# Altium PCB PCBVer3.PcbDoc
Units mm, origin at the board's own origin, x right, y up, seen from the top; angles counter-clockwise.
Board outline 39.9 x 13 mm, 6 copper layers (Top Signal Layer, GND_1, PWR, Mid Signal Layer, GND_2, Bottom Signal Layer), stack 1.244 mm thick; 66 components, 58 nets, 318 pads, 85 vias.
Unrouted connection lines stored in the file: 2.
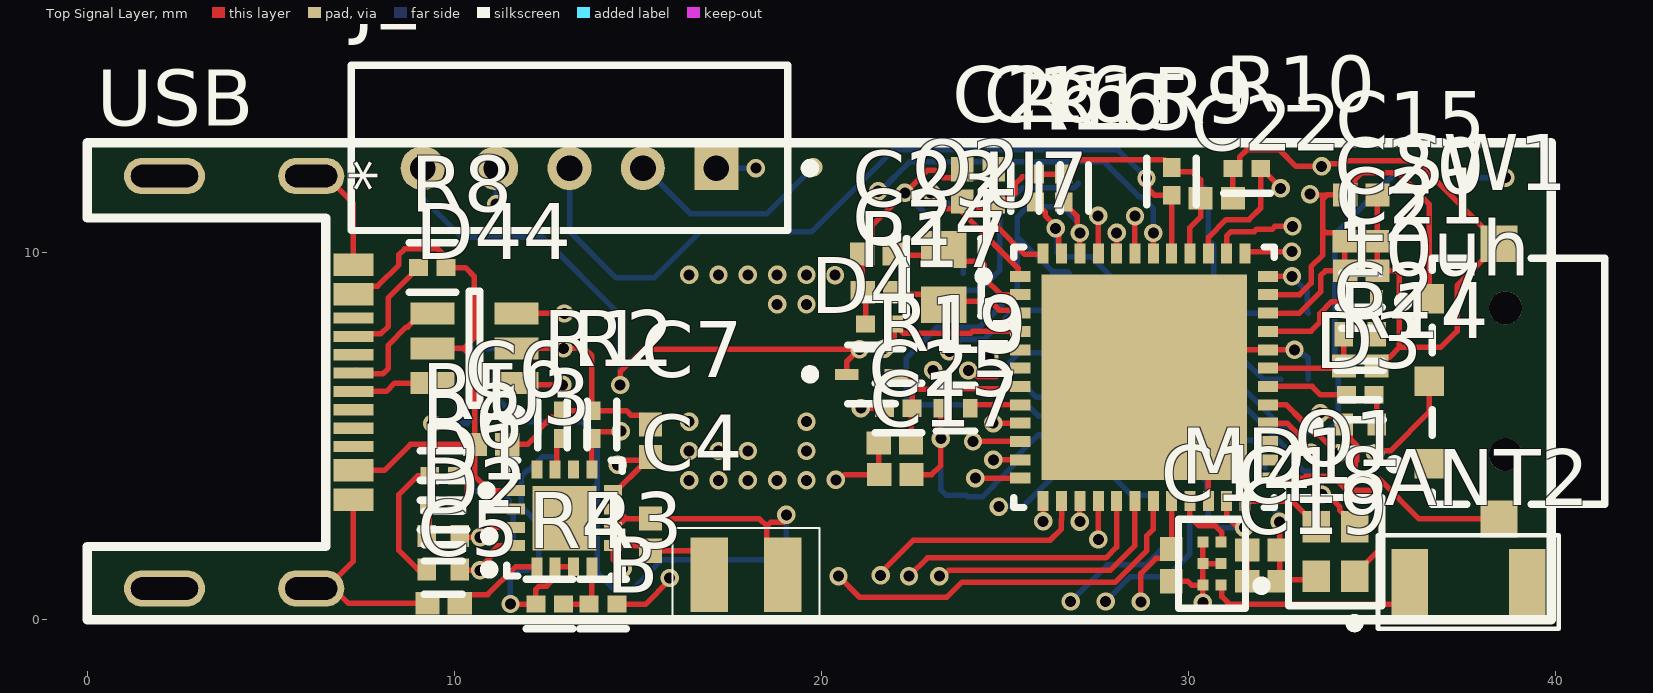
[diagram p0: Top Signal Layer view]
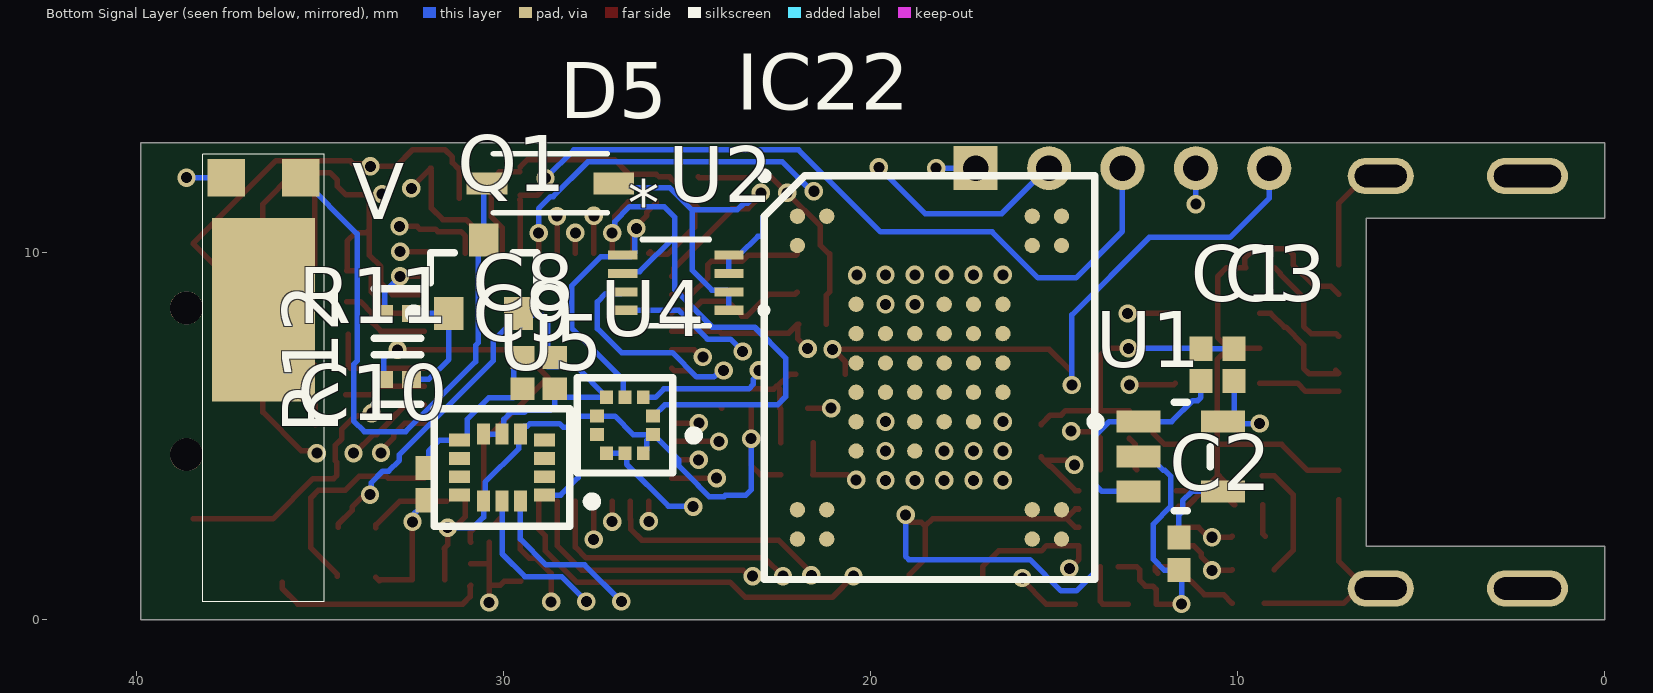
[diagram p1: Bottom Signal Layer view, seen from below]
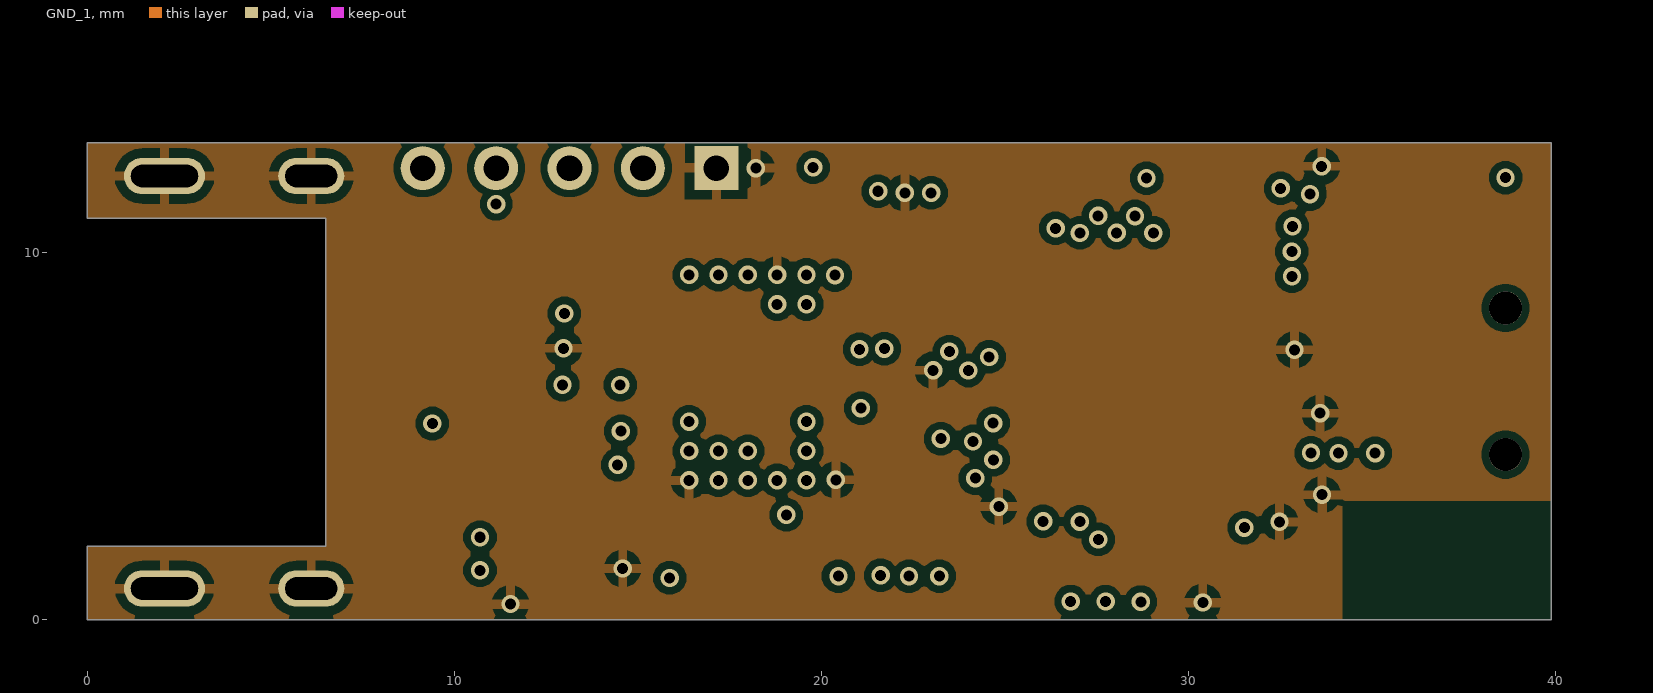
[diagram p2: GND_1]
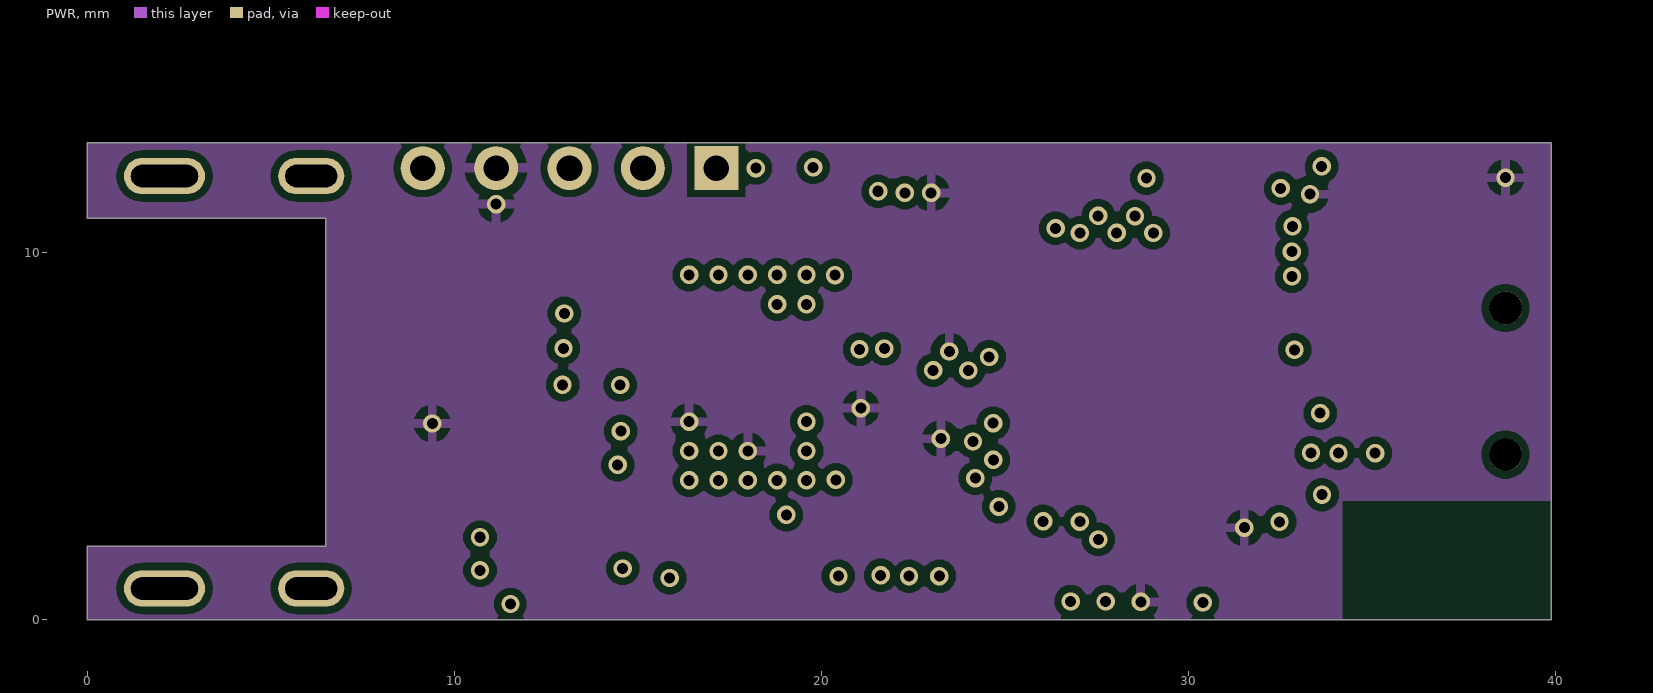
[diagram p3: PWR]
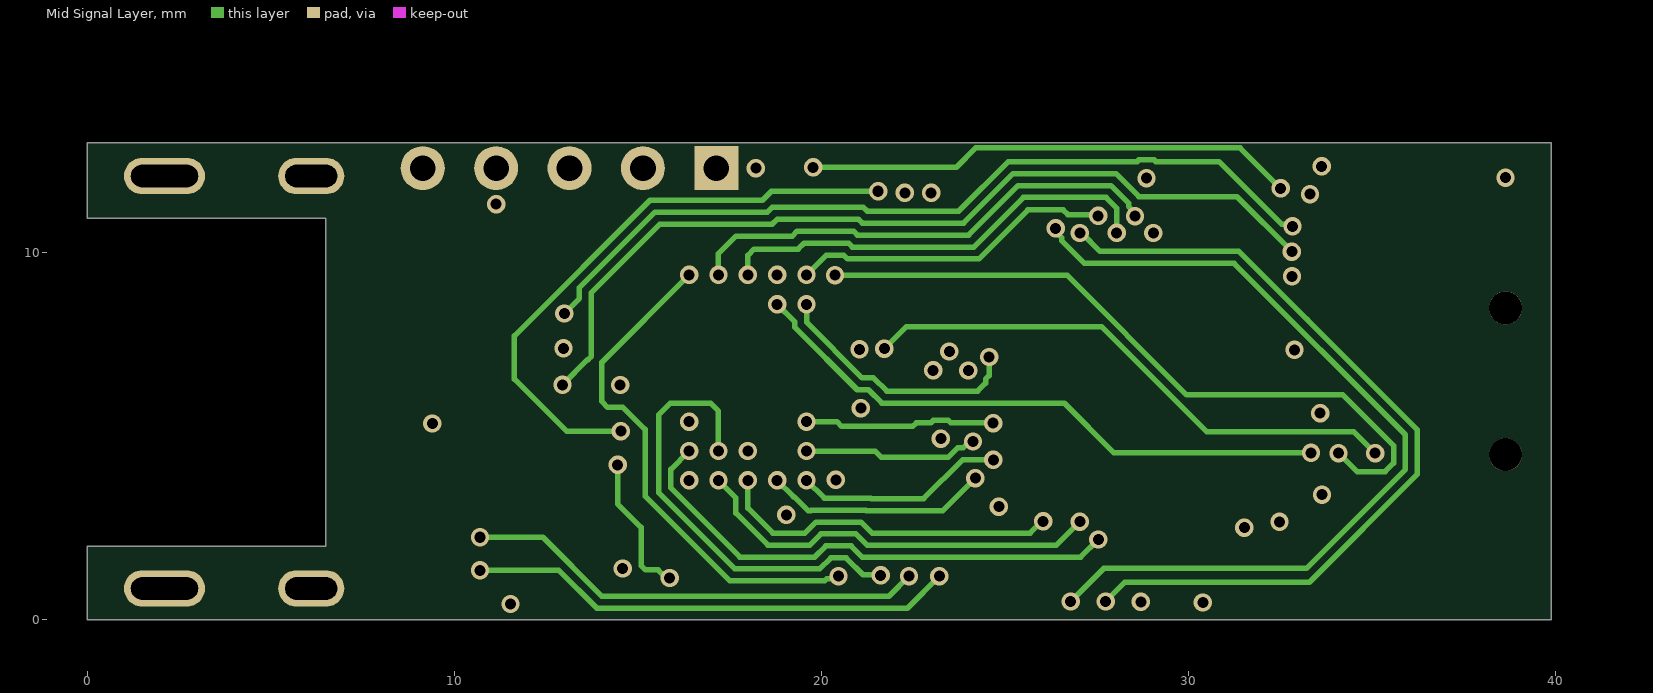
[diagram p4: Mid Signal Layer]
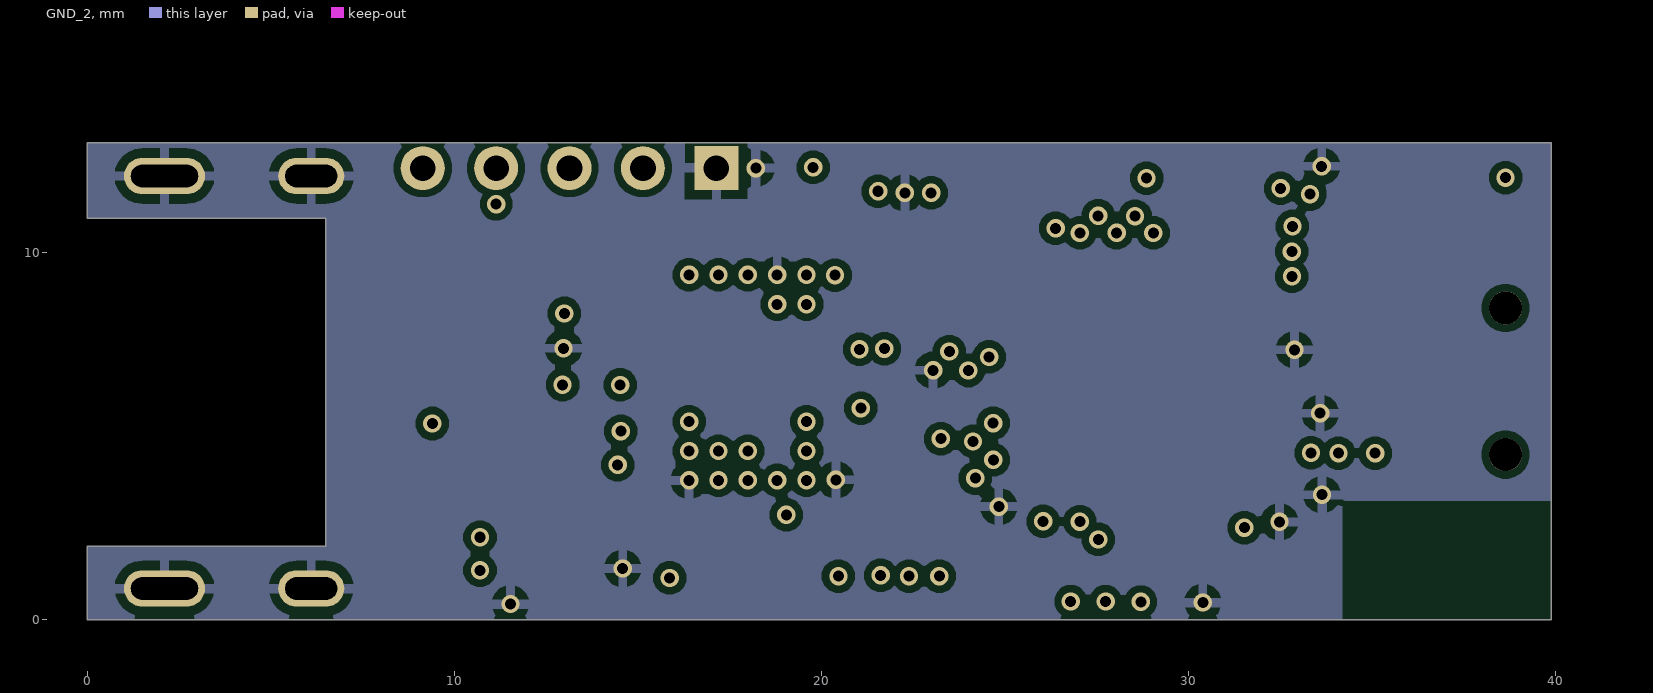
[diagram p5: GND_2]
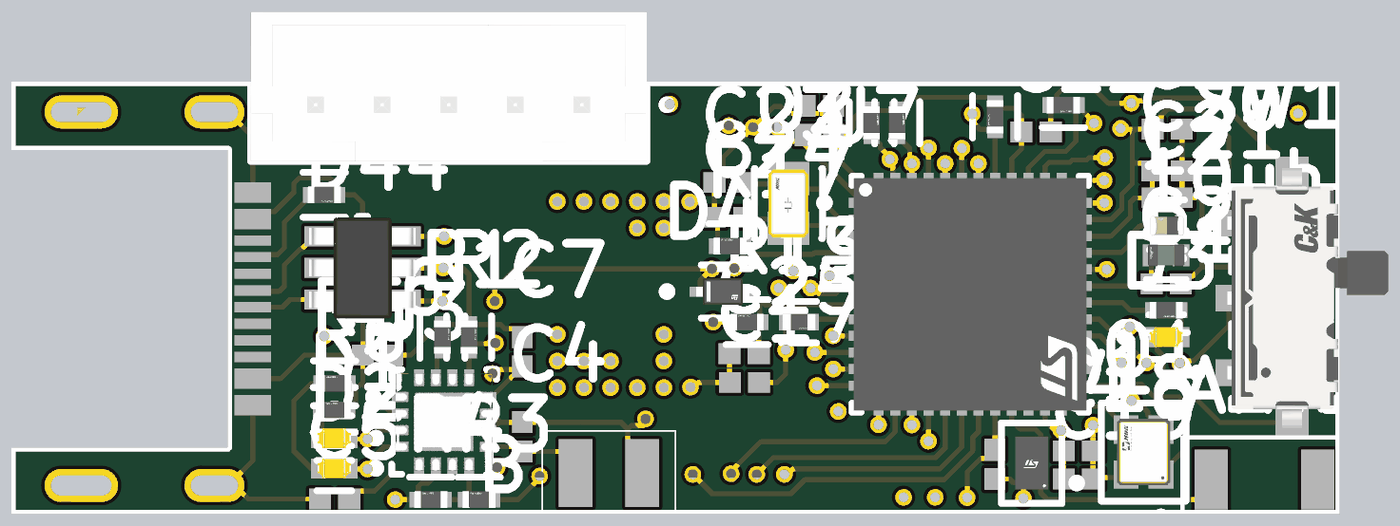
[diagram p6: 3D render of the assembled board from above, using the file's embedded part models]

## Layer stack, top to bottom
Top Solder: solder mask 0.0102, Solder Resist, Dk 3.5
Top Signal Layer: signal copper 0.018
Dielectric 2: prepreg 0.125, PP-006, Dk 4.1
GND_1: signal copper 0.035
Dielectric 4: prepreg 0.0711, PP-006, Dk 4.1
PWR: signal copper 0.018
Dielectric 1: dielectric 0.71, FR-4, Dk 4.8
Mid Signal Layer: signal copper 0.018
Dielectric 5: prepreg 0.0711, PP-006, Dk 4.1
GND_2: signal copper 0.035
Dielectric 3: prepreg 0.125, PP-006, Dk 4.1
Bottom Signal Layer: signal copper 0.018
Bottom Solder: solder mask 0.0102, Solder Resist, Dk 3.5

## Board outline
0,10.95 0,13 39.9,13 39.9,0 0,0 0,2 6.5,2 6.5,10.95

## Design rules (kind name [scope] priority, off if disabled: settings)
Clearance [All] p1: gap=0.2 ignorepadtopadclearanceinfootprint=FALSE except(0.175: Arc-Arc Arc-Track Arc-Via Arc-Hole Track-Track Track-Via Track-Hole Via-Via Via-Hole)
PolygonConnect [All] p1: connectstyle=Relief reliefconductorwidth=0.254 reliefentries=4 polygonreliefangle="90 Angle" airgapwidth=0.254
RoomDefinition U_LSM6DSRXTR [InComponentClass('U_LSM6DSRXTR')] p1: confinementstyle=ConfineIn formatcopy=TRUE lockcomponents=FALSE outline 26.8,-0.35 35.45,-0.35 35.45,7.3 26.8,7.3
RoomDefinition U_VIBRO [InComponentClass('U_VIBRO')] p2: confinementstyle=ConfineIn formatcopy=TRUE lockcomponents=FALSE outline 20.3,0.1 42.6,0.1 42.6,13.45 20.3,13.45
RoomDefinition U_LPS22HBTR [InComponentClass('U_LPS22HBTR')] p3: confinementstyle=ConfineIn formatcopy=TRUE lockcomponents=FALSE outline 30.3,3.15 24.6,3.15 24.6,7.9 30.3,7.9
RoomDefinition U_SWD [InComponentClass('U_SWD')] p4: confinementstyle=ConfineIn formatcopy=TRUE lockcomponents=FALSE outline 32.7,10.7 32.7,13.45 8,13.45 8,10.7
RoomDefinition U_M24512-DFMC6TG [InComponentClass('U_M24512-DFMC6TG')] p5: confinementstyle=ConfineIn formatcopy=TRUE lockcomponents=FALSE outline 22.7,10.65 22.7,7.5 27.6,7.5 27.6,10.65
RoomDefinition U_LD3985M33R [InComponentClass('U_LD3985M33R')] p6: confinementstyle=ConfineIn formatcopy=TRUE lockcomponents=FALSE outline 16.1,-0.35 16.1,8.65 7.6,8.65 7.6,-0.35
RoomDefinition U_STM32WB55CGU6 [InComponentClass('U_STM32WB55CGU6')] p7: confinementstyle=ConfineIn formatcopy=TRUE lockcomponents=FALSE outline 13.2,-0.36 42.57,-0.36 42.57,13.44 13.2,13.44
RoomDefinition U_L6924D013TR [InComponentClass('U_L6924D013TR')] p8: confinementstyle=ConfineIn formatcopy=TRUE lockcomponents=FALSE outline 8.35,-0.37 20.3,-0.37 20.3,6.33 8.35,6.33
RoomDefinition U_USB [InComponentClass('U_USB')] p9: confinementstyle=ConfineIn formatcopy=TRUE lockcomponents=FALSE outline -0.35,-0.35 13.15,-0.35 13.15,13.45 -0.35,13.45
RoutingVias [All] p1: holewidth=0.3 width=0.5 viastyle="Through Hole" minholewidth=0.3 minwidth=0.5 maxholewidth=0.3 maxwidth=0.5
SolderMaskExpansion [All] p1: expansion=0.102 istentingtop=FALSE
Width [All] p1: maxlimit=0.4 minlimit=0.15 preferedwidth=0.15 midlayer3_minwidth=0.254 midlayer3_maxwidth=0.254 midlayer3_prefwidth=0.254 midlayer4_minwidth=0.254 midlayer4_maxwidth=0.254 midlayer4_prefwidth=0.254 minimp=50.000000 maximp=50.000000 favimp=50.000000
30 further rules are at their usual default settings.

## Classes and differential pairs
component class U_VIBRO: D5 Q1 R11 R12 V
component class U_USB: D44 R8 USB
component class U_TC58BVG1S3HBAI4: IC22
component class U_SWD: J2 R9 R10
component class U_STM32WB55CGU6: 10uh ANT2 C14 C15 C16 C17 C18 C19 C20 C21 C22 C23 C24 C25 C26 C27 D3 D4 L2 L3 MD1 O1 O2 R14 R15 R16 R17 R19 SW1 U7
component class U_M24512-DFMC6TG: U2
component class U_LSM6DSRXTR: C9 C10 U5
component class U_LPS22HBTR: C8 U4
component class U_LD3985M33R: C1 C2 C3 U1
component class U_L6924D013TR: B C4 C5 C6 C7 D1 D2 R1 R2 R3 R4 R5 R6 U3

## Components (designator, comment, footprint, x,y, rotation, side; value= is the part's Value field where it differs from the comment)
10uh "L1" FP-LQW15DN_00-MFG 34.69,7.78 r180 top
ANT2 "KH3216-A55" KH3216-A55 37.69,1.03 r270 top
B "BAT-CON" BAT-CON 17.95,1.23 r180 top
C1 "10 uF" CAPC1005X55X25NL05T10 11,6.95 r270 bottom
C2 "10 nF" CAPC1005X55X25NL05T10 11.6,1.8 r90 bottom
C3 "1 uF" CAPC1005X55X25NL05T10 10.1,6.95 r270 bottom
C4 "1 uF" CAPC1005X55X25NL05T10 15.35,2.32 r90 top
C5 "330 pF" CAPC1005X55X25NL05T10 9.71,0.449 r180 top
C6 "1 uF" CAPC1005X55X25NL05T10 11,4.78 r0 top
C7 "1 uF" CAPC1005X55X25NL05T10 15.35,4.88 r270 top
C8 "4.7 uF" CAPC1005X55X25NL05T10 29.05,7.15 r0 bottom
C9 "100 nF" CAPC1005X55X25NL05T10 29.05,6.3 r0 bottom
C10 "100 nF" CAPC1005X55X25NL05T10 32.1,3.7 r90 bottom
C14 "100 nF" CAPC1005X55X25NL05T10 29.54,1.49 r270 top
C15 "100 nF" CAPC1005X55X25NL05T10 34.72,11.58 r180 top
C16 "100 nF" CAPC1005X55X25NL05T10 24.7,11.84 r90 top
C17 "100 nF" CAPC1005X55X25NL05T10 22.02,3.96 r0 top
C18 "100 nF" CAPC1005X55X25NL05T10 32.05,1.9 r0 top
C19 "100 pF" CAPC1005X55X25NL05T10 32.05,1.05 r180 top
C20 "4.7 uF" CAPC1005X55X25NL05T10 34.71,10.32 r180 top
C21 "100 nF" CAPC1005X55X25NL05T10 34.72,9.51 r0 top
C22 "100 nF" CAPC1005X55X25NL05T10 30.78,11.49 r180 top
C23 "4.3 pF" CAPC1005X55X25NL05T10 21.56,9.97 r180 top
C24 "4.3 pF" CAPC1005X55X25NL05T10 21.57,8.93 r0 top
C25 "100 nF" CAPC1005X55X25NL05T10 22.01,4.82 r0 top
C26 "100 nF" CAPC1005X55X25NL05T10 23.84,11.84 r270 top
C27 "4.7 uF" CAPC1005X55X25NL05T10 34.69,6.92 r0 top
D1 "LED" FP-SML-P11MTT86-MFG 9.7,2.28 r180 top
D2 "LED" FP-SML-P11MTT86-MFG 9.7,1.37 r180 top
D3 "LED" FP-SML-P11MTT86-MFG 34.69,5.32 r0 top
D4 "BAT54KFILM" FP-SOD-523-MFG 21.37,6.69 r0 top value=7pF
D5 "BAT43W-7-F" BAT43W-7-F 28.68,11.92 r0 bottom
D44 "USBLC6-2SC6" STM-SOT23-6L_V 10.55,7.4 r180 top
IC22 "TC58BVG1S3HBAI4" BGA63C80P10X12_900X1100X100 18.4,6.6 r180 bottom
J2 "B5B-PH-K-S(LF)(SN)" FP-B5B-PH-K-S_LF_SN-MFG 13.14,12.86 r180 top
L2 "10nh" FP-LQG15WH_02-MFG 34.71,8.67 r180 top
L3 "FBH1005-601Y" FP-BLM15-0_05-MFG 23.66,5.77 r0 top
MD1 "MLPF-WB55-01E3" FP-MLPF-WB55-01E3-MFG 30.65,1.53 r180 top
O1 "NX2016SA-32MHZ" FP-NX2016SA-MFG 34.01,1.86 r90 top
O2 "NX2012SA-32.768K" FP-NX2012SA-MFG 23.34,9.34 r270 top
Q1 "DMG3420U-7" DIOD-SOT23-3_B_V 30.55,9.35 r90 bottom
R1 "130 Kohm" FP-RC1005-IPC_C 12.95,5.32 r90 top
R2 "3.3 Kohm" FP-RC1005-IPC_C 13.75,5.32 r90 top
R3 "1 Kohm" FP-RC1005-IPC_C 14.05,0.43 r180 top
R4 "470 ohm" FP-RC1005-IPC_C 12.6,0.43 r180 top
R5 "680 Om" FP-RC1005-IPC_C 9.71,3.93 r180 top
R6 "680 Om" FP-RC1005-IPC_C 9.7,3.13 r180 top
R8 "5.3 Kohm" FP-RC1005-IPC_C 9.4,9.6 r0 top
R9 "10 Kohm" FP-RC1005-IPC_C 29.55,11.95 r270 top
R10 "10 Kohm" FP-RC1005-IPC_C 31.6,12.3 r0 top
R11 "100 Kohm" FP-RC1005-IPC_C 32.9,6.55 r0 bottom
R12 "100 ohm" FP-RC1005-IPC_C 32.9,8.35 r0 bottom
R14 "0 ohm" FP-RC1005-IPC_C 34.69,6.13 r0 top
R15 "1.8 Kohm" FP-RC1005-IPC_C 26.61,11.77 r90 top
R16 "1.8 Kohm" FP-RC1005-IPC_C 25.84,11.77 r90 top
R17 "10Kohm" FP-RC1005-IPC_C 21.59,8.06 r180 top
R19 "100 Kohm" FP-RC1005-IPC_C 22.1,5.77 r180 top
SW1 "JS102000SAQN" FP-JS102000SAQN-MFG 39,6.5 r90 top
U1 "LD3985M33R" FP-SOT23-5L-7049676-MFG 11.55,4.45 r180 bottom
U2 "M24512-DFMC6TG" M24512-DFMC6TG 25.34,9.29 r0 bottom
U3 "L6924D013TR" FP-VFQFPN16-7185330-MFG 13,2.77 r0 top
U4 "LPS22HBTR" FP-HLGA-10L-8479831-0 26.7,5.3 r0 bottom
U5 "LSM6DSRXTR" FP-LGA-14L-DM00249496-MFG 30.05,4.15 r0 bottom
U7 "STM32WB55CGU6" FP-STM32WB55CGU6-MFG 28.8,6.61 r0 top
USB "USB4510-03-1-A" USB4510-03-1-A 3.3,6.5 r270 top
V "VIBRO" VIBRO 36.55,12.05 r180 bottom

## Footprints (in the part's own frame and the unit in brackets; to place one, negate y for a bottom-side part, rotate by r counter-clockwise, add the part's x,y. Pads: shape width x height; smd on the part's side, far side on the other; paste and mask are expansions set on the pad)
BAT43W-7-F [mil]
  rect 43.75x23.65 smd paste+0 mask+0: 1(-65.91,1) 2(69.91,1)
  silkscreen extent -59,-31 63,33
BAT-CON [mil]
  rect 40x80 smd: 1(-39.37,0) 2(39.37,0)
  silkscreen extent -79,-50 79,50
BGA63C80P10X12_900X1100X100 [mm]
  round 0.418 smd: A1(-3.6,4.4) A2(-2.8,4.4) A9(2.8,4.4) A10(3.6,4.4) B1(-3.6,3.6) B9(2.8,3.6) B10(3.6,3.6) C3(-2,2.8) C4(-1.2,2.8) C5(-0.4,2.8) C6(0.4,2.8) C7(1.2,2.8) C8(2,2.8) D3(-2,2) D4(-1.2,2) D5(-0.4,2) D6(0.4,2) D7(1.2,2) D8(2,2) E3(-2,1.2) E4(-1.2,1.2) E5(-0.4,1.2) E6(0.4,1.2) E7(1.2,1.2) E8(2,1.2) F3(-2,0.4) F4(-1.2,0.4) F5(-0.4,0.4) F6(0.4,0.4) F7(1.2,0.4) F8(2,0.4) G3(-2,-0.4) G4(-1.2,-0.4) G5(-0.4,-0.4) G6(0.4,-0.4) G7(1.2,-0.4) G8(2,-0.4) H3(-2,-1.2) H4(-1.2,-1.2) H5(-0.4,-1.2) H6(0.4,-1.2) H7(1.2,-1.2) H8(2,-1.2) J3(-2,-2) J4(-1.2,-2) J5(-0.4,-2) J6(0.4,-2) J7(1.2,-2) J8(2,-2) K3(-2,-2.8) K4(-1.2,-2.8) K5(-0.4,-2.8) K6(0.4,-2.8) K7(1.2,-2.8) K8(2,-2.8) L1(-3.6,-3.6) L2(-2.8,-3.6) L9(2.8,-3.6) L10(3.6,-3.6) M1(-3.6,-4.4) M2(-2.8,-4.4) M9(2.8,-4.4) M10(3.6,-4.4)
  silkscreen extent -4.6,-5.5 4.5,5.6, body extent -4.5,-5.5 4.5,5.5, height 1
CAPC1005X55X25NL05T10 [mm] "Chip Capacitor, 2-Leads, Body 1.00x0.50mm, IPC Medium Density"
  rect 0.66x0.62 smd: 1(-0.44,0) 2(0.44,0)
  body extent -0.53,-0.28 0.53,0.27, height 0.55
DIOD-SOT23-3_B_V [mm] "SOT23, 3-Leads, Body 2.9x1.3mm, Pitch 0.95mm"
  rect 0.9x0.8 smd: 1(-1,0.95) 2(-1,-0.95) 3(1,0)
  silkscreen extent -1.12,-1.45 0.65,2.03, body extent -0.65,-1.45 0.65,1.45, height 1.17
FP-B5B-PH-K-S_LF_SN-MFG [mm]
  rect 1.2x1.2 hole 0.7 paste-2539.97 mask+0: 1(-4,0.55)
  round 1.2 hole 0.7 paste-2539.97 mask+0: 2(-2,0.55) 3(0,0.55) 4(2,0.55) 5(4,0.55)
  silkscreen extent -6.68,-2.25 5.95,2.25, body extent -6.05,-2.35 6.05,2.35, height 0.25
FP-BLM15-0_05-MFG [mm]
  rect 0.4x0.5 smd paste+0 mask+0: 1(-0.4,0) 2(0.4,0)
  silkscreen extent -0.53,-0.63 0.52,0.63, body extent -0.7,-0.38 0.7,0.38, height 0.25
FP-HLGA-10L-8479831-0 [mm]
  rect 0.375x0.35 smd paste+0 mask+0: 1(-0.763,0.25) 2(-0.763,-0.25) 6(0.763,-0.25) 7(0.763,0.25)
  rect 0.35x0.375 smd paste+0 mask+0: 3(-0.5,-0.763) 4(0,-0.763) 5(0.5,-0.763) 8(0.5,0.763) 9(0,0.763) 10(-0.5,0.763)
  silkscreen extent -2,-1.3 1.3,1.3, body extent -1,-1 1,1, height 0.8
FP-JS102000SAQN-MFG [mm]
  rect 0.8x0.8 smd paste+0 mask+0: 1(-2.25,2.43) 2(0,2.43) 3(2.25,2.43)
  rect 1x1 smd paste+0 mask+0: 4(-3.75,0.53) 5(3.75,0.53)
  round 0.9 hole 0.9 unplated paste-2539.97 mask+0: ""(-2,0.35) ""(2,0.35)
  silkscreen extent -3.35,-2.35 3.35,3.5, body extent -4.35,-2.45 4.35,2.93, height 0.25
FP-LGA-14L-DM00249496-MFG [mm]
  rect 0.575x0.35 smd paste-1000 mask+0: 1(-1.162,0.75) 2(-1.162,0.25) 3(-1.162,-0.25) 4(-1.162,-0.75) 8(1.162,-0.75) 9(1.162,-0.25) 10(1.162,0.25) 11(1.162,0.75)
  rect 0.35x0.575 smd paste-1000 mask+0: 5(-0.5,-0.913) 6(0,-0.913) 7(0.5,-0.913) 12(0.5,0.913) 13(0,0.913) 14(-0.5,0.913)
  silkscreen extent -2.57,-1.6 1.85,1.6, body extent -1.5,-1.25 1.5,1.25, height 0.86
FP-LQG15WH_02-MFG [mm]
  rect 0.35x0.65 smd paste+0 mask+0: 1(-0.425,0) 2(0.425,0)
  silkscreen extent -1.28,-0.78 0.53,0.72, body extent -0.7,-0.43 0.7,0.43, height 0.25
FP-LQW15DN_00-MFG [mm]
  rect 0.5x0.66 smd paste+0 mask+0: 1(-0.45,0) 2(0.45,0)
  silkscreen extent -0.6,-0.74 0.6,0.72, body extent -0.8,-0.48 0.8,0.48, height 0.25
FP-MLPF-WB55-01E3-MFG [mm]
  rect 0.3x0.3 smd paste-1000 mask-1000: A1(-0.25,0.587) A2(-0.25,0) A3(-0.25,-0.587) B1(0.25,0.587) B2(0.25,0) B3(0.25,-0.587)
  silkscreen extent -1.48,-1.21 0.91,1.21, body extent -1.01,-1.31 1.01,1.31, height 0.25
FP-NX2012SA-MFG [mm]
  rect 1x1.25 smd paste+0 mask+0: 1(-0.75,0) 2(0.75,0)
  silkscreen extent -1.05,-1.02 1.05,1.02, body extent -1.35,-0.72 1.35,0.72, height 0.25
FP-NX2016SA-MFG [mm]
  rect 0.85x0.75 smd paste+0 mask+0: 1(-0.675,-0.525) 2(0.675,-0.525) 3(0.675,0.525) 4(-0.675,0.525)
  silkscreen extent -2.07,-1.28 1.48,1.28, body extent -1.2,-1 1.2,1, height 0.25
FP-RC1005-IPC_C [mm]
  rect 0.515x0.472 smd paste+0 mask+0: 1(-0.379,0) 2(0.379,0)
  silkscreen extent -0.64,-0.67 0.64,0.67, body extent -0.74,-0.38 0.74,0.38, height 0.25
FP-SML-P11MTT86-MFG [mm]
  rect 0.5x0.6 smd paste+0 mask+0: 1(-0.45,0) 2(0.45,0)
  silkscreen extent -1.38,-0.67 0.53,0.67, body extent -0.8,-0.43 0.8,0.43, height 0.25
FP-SOD-523-MFG [mm]
  rect 0.65x0.3 smd paste+0 mask+0: 1(-0.675,0) 2(0.675,0)
  silkscreen extent -1.8,-0.8 0.65,0.8, body extent -1.1,-0.55 1.1,0.55, height 0.25
FP-SOT23-5L-7049676-MFG [mm]
  rect 1.2x0.6 smd paste+0 mask+0: 1(-1.15,0.95) 2(-1.15,0) 3(-1.15,-0.95) 4(1.15,-0.95) 5(1.15,0.95)
  silkscreen extent -2.45,-1.48 0.8,1.47, body extent -0.87,-1.5 0.87,1.5, height 1.45
FP-STM32WB55CGU6-MFG [mm]
  rect 0.55x0.3 smd paste+0 mask+0: 1(-3.375,2.75) 2(-3.375,2.25) 3(-3.375,1.75) 4(-3.375,1.25) 5(-3.375,0.75) 6(-3.375,0.25) 7(-3.375,-0.25) 8(-3.375,-0.75) 9(-3.375,-1.25) 10(-3.375,-1.75) 11(-3.375,-2.25) 12(-3.375,-2.75) 25(3.375,-2.75) 26(3.375,-2.25) 27(3.375,-1.75) 28(3.375,-1.25) 29(3.375,-0.75) 30(3.375,-0.25) 31(3.375,0.25) 32(3.375,0.75) 33(3.375,1.25) 34(3.375,1.75) 35(3.375,2.25) 36(3.375,2.75)
  rect 0.3x0.55 smd paste+0 mask+0: 13(-2.75,-3.375) 14(-2.25,-3.375) 15(-1.75,-3.375) 16(-1.25,-3.375) 17(-0.75,-3.375) 18(-0.25,-3.375) 19(0.25,-3.375) 20(0.75,-3.375) 21(1.25,-3.375) 22(1.75,-3.375) 23(2.25,-3.375) 24(2.75,-3.375) 37(2.75,3.375) 38(2.25,3.375) 39(1.75,3.375) 40(1.25,3.375) 41(0.75,3.375) 42(0.25,3.375) 43(-0.25,3.375) 44(-0.75,3.375) 45(-1.25,3.375) 46(-1.75,3.375) 47(-2.25,3.375) 48(-2.75,3.375)
  rect 5.6x5.6 smd paste+0 mask+0: 49(0,0)
  silkscreen extent -4.5,-3.55 3.55,3.55, body extent -3.75,-3.75 3.75,3.75, height 0.25
FP-VFQFPN16-7185330-MFG [mm]
  rect 0.5x0.3 smd paste+0 mask+0: 1(-1.325,0.75) 2(-1.325,0.25) 3(-1.325,-0.25) 4(-1.325,-0.75) 9(1.325,-0.75) 10(1.325,-0.25) 11(1.325,0.25) 12(1.325,0.75)
  rect 0.3x0.5 smd paste+0 mask+0: 5(-0.75,-1.325) 6(-0.25,-1.325) 7(0.25,-1.325) 8(0.75,-1.325) 13(0.75,1.325) 14(0.25,1.325) 15(-0.25,1.325) 16(-0.75,1.325)
  rect 1.75x1.75 smd paste+0 mask+0: 17(0,0)
  silkscreen extent -2.25,-1.58 1.58,1.58, body extent -1.68,-1.68 1.68,1.68, height 0.25
KH3216-A55 [mm]
  rect 1.8x1 smd: 1(0,-1.651) 2(0,1.549)
  silkscreen extent -1.27,-2.51 1.27,2.41
M24512-DFMC6TG [mm]
  rect 0.8x0.25 smd paste+0 mask+0: 1(-1.475,0.852) 2(-1.475,0.352) 3(-1.475,-0.149) 4(-1.475,-0.649) 5(1.424,-0.649) 6(1.424,-0.149) 7(1.424,0.352) 8(1.424,0.852)
  silkscreen extent -2.53,-1.08 0.88,1.28
STM-SOT23-6L_V [mm] "SOT23, 6-Leads, Body 3.05x1.75mm, Pitch 0.95mm"
  rect 1.2x0.6 smd: 1(-1.15,0.95) 2(-1.15,0) 3(-1.15,-0.95) 4(1.15,-0.95) 5(1.15,0) 6(1.15,0.95)
  silkscreen extent -1.28,-1.55 0.15,1.92, body extent -1.6,-1.53 1.6,1.53, height 1.45
USB4510-03-1-A [mil]
  rect 24x43 smd paste+0 mask+0: A1-B12(-125,155.5) A4-B9(-93.5,155.5) B1-A12(127,155.5) B4-A9(95.5,155.5)
  rect 12x43 smd paste+0 mask+0: A5(-48.2,155.5) A6(-8.8,155.5) A7(10.9,155.5) A8(50.3,155.5) B5(70,155.5) B6(30.6,155.5) B7(-28.5,155.5) B8(-68,155.5)
  oval 39x71 hole 24 slot 56 at 90 deg: GND(-220.25,110.25) GND(222.25,110.25)
  oval 39x87 hole 24 slot 72 at 90 deg: GND(-220.25,-47.2) GND(222.25,-47.2)
VIBRO [mil]
  rect 40x40 smd mask+1: 1(40,0) 2(-40,0)
  rect 110.24x196.85 smd: 3(0,-141.73)
  silkscreen extent -65,-455 65,25

## Part data
10uh: library part CMP-06042-016523-1, "FIXED IND 10UH 120MA 5.405OHM", RoHS Compliant=Yes
C1 C2 C3 C4 C5 C6 C7 C8 C9 C10 C14 C15 C16 C17 C18 C19 C20 C21 C22 C23 C24 C25 C26 C27: library part CMP-2008-04515-1, Manufacturer=Murata, Part Number=GRM155F50J684ZE01D
D1 D2 D3: library part CMP-2000-07126-2, "LED YELLOW/GREEN CLEAR 1006 SMD", Case Code (Imperial)=0402, Case Code (Metric)=1005, Color=Green, Forward Current=20mA, Forward Voltage=1.9V, Lens Color=Colorless, Max Operating Temperature=85°C, Min Operating Temperature=-40°C, Package Quantity=1, Power Rating=54mW, Test Current=1mA, Case/Package=0402, Dominant Wavelength=569nm, Height=0.25mm, Illumination Color=Green, Lead Free="Lead Free", Length=1mm, Lens Style=Diffused, Lens Transparency=Clear, Luminous Intensity=2.1mcd, Mount="Surface Mount", Number of LEDs=1, Number of Pins=2, Packaging="Tape and Reel", Radiation Hardening=No, REACH SVHC="No SVHC", RoHS Compliant=Yes, Series=PicoLED™, Viewing Angle=150°, Wavelength=569nm, Width=0.6mm
D4: library part CMP-12187-000026-1, "DIODE SCHOTTKY 40V 300MA SOD523", Capacitance=7pF, Forward Current=300mA, Manufacturer=STMicroelectronics, Max Junction Temp=+150°C, Max Repetitive Reverse Voltage=40V, Max Surge Forward Current=1.25A, Package=SOD-523, Peak Reverse Current=1uA, Temperature="-40°C to +150°C", Temperature Range Low=-40°C, Automotive=No, Category=Diode, ComponentLink2Description=Datasheet, ComponentLink2URL=https://www.st.com/content/ccc/resource/technical/document/datasheet/07/50/54/f2/0d/ba/4a/79/CD00001322.pdf/files/CD00001322.pdf/jcr:content/translations/en.CD00001322.pdf, Device Class L1="Discrete Semiconductors", Device Class L2=Diodes, Device Class L3="Schottky Diodes", Digikey Description="DIODE SCHOTTKY 40V 300MA SOD523", Height=0.7mm, Lead Free=Yes, Manufacturer Part Number=BAT54KFILM, Mouser Description="Schottky Diodes & Rectifiers schottky diode", Octopart=https://octopart.com/bat54kfilm-stmicroelectronics-39618022, RoHS=TRUE, Temperature Range High=+150°C
D44: library part CMP-2000-05378-1, "Very low capacitance ESD protection, 3.5 pF, -40 to 125 degC, 6-Pin SOT23, RoHS, Tape and Reel", Capacitance Value=3.5pF, Clamping Voltage=17V, Leakage Current=0.15uA, Manufacturer=STMicroelectronics, Operating Temp Range=-40Cto125C, Operating Temperature Classification=Automotive, Operating Temperature Max Deg. C=125C, Operating Temperature Min Deg. C=-40C, Package / Case=SOT-23, Package Description="6-Pin Small Outline Transistor, Body 2.925 x 1.625 mm, Pitch 0.95 mm", Package Reference=SOT23-6L, Peak Pulse Current=5A, Reverse Breakdown Voltage=6V, Reverse Stand-off Voltage=5V, Test Current (It)=1mA, Clamping Voltage (Max)=17V, Configuration=Dual, Datasheet URL=http://www.st.com/st-web-ui/static/active/en/resource/technical/document/datasheet/CD00050750.pdf, Datasheet Version="Rev. 5, 10/2011", Direction Type=Uni-Directional, Leakage Current (Max)=0.15uA, Manufacturer URL=http://www.st.com/, Mounting=SurfaceMount, Mounting Style=SurfaceMount, Number of Elements=1, Packaging=TapeandReel, Pin Count=6, Polarity=Uni-Directional, Product Depth (mm)=1.75mm, Product Height (mm)=1.3mm, Product Length (mm)=3.05mm, Rad Hardened=No, Suppressor Type=DiodeArrays, Working Voltage=5V, Working Voltage (Max)=5V
IC22: "Integrated Circuit", Manufacturer_Name=Toshiba, Mouser Part Number=757-TC58BVG1S3HBAI4, Datasheet Link=https://media.digikey.com/pdf/Data%20Sheets/Toshiba%20PDFs/KIOXIA_TC58BVG1S3HBAI4_REV2.00_E20191001C.pdf, Height=1mm, Manufacturer_Part_Number=TC58BVG1S3HBAI4, Mouser Price/Stock=https://www.mouser.com/Search/Refine.aspx?Keyword=757-TC58BVG1S3HBAI4
J2: library part CMP-2000-05908-2, "CONN HEADER VERT 5POS 2MM", Color=Natural, Contact Resistance=20mR, Current Rating=2A, Flammability Rating="UL94 V-0", Housing Color=White, Insulation Resistance=1MR, Max Operating Temperature=85°C, Max Voltage Rating (AC)=100V, Min Operating Temperature=-25°C, Connector Type=Header, Contact Finish - Mating=TIN, Contact Material=Brass, Contact Mating Length=0.13inch, Contact Plating=Tin, Contact Shape=Square, Contact Type="Male Pin", Depth=4.5mm, Fastening Type=Detent, Gender=Male, Height=9.4mm, Housing Material=Polyamide, Insulation Color=Natural, Insulation Material=Nylon, Lead Free="Lead Free", Lead Pitch=2mm, Length=11.9mm, Mated Stacking Heights=8mm, Material=Polyamide, Max Current Rating=2A, Mount="Through Hole", Number of Contacts=5, Number of Pins=5, Number of Poles=5, Number of Positions=5, Number of Rows=1, Orientation=Straight, Packaging=Bulk, Pitch=2mm, REACH SVHC="No SVHC", Series=PH, Termination=Solder, Voltage Rating=100V, Voltage Rating (AC)=100V, Width=4.5mm, Working Voltage=100V
L2: library part CMP-06042-005237-1, "Multilayer type Inductor for Automotive 10nH ±5% 0.19Ω 500mA 0402", Case Code (Imperial)=0402, Case Code (Metric)=1005, Current Rating=500mA, DC Resistance (DCR)=190mR, Inductance=10nH, Max Operating Temperature=125°C, Min Operating Temperature=-55°C, Ratings=AEC-Q200, Self Resonant Frequency=3.3GHz, Test Frequency=100MHz, Tolerance=5%, Case/Package=0402, Core Material=Air, Mount="Surface Mount", Packaging="Cut Tape", Shielding=Unshielded
L3: library part CMP-0686-00187-4, "Chip Ferrite Bead, 0402, 600Ω @ 100MHz, 0.52Ω, 25%, 300mA", Case Code (Imperial)=0402, Case Code (Metric)=1005, Current Rating=300mA, DC Resistance (DCR)=520mR, DC Resistance-Max=600mR, Frequency=100MHz, Max Operating Temperature=125°C, Min Operating Temperature=-55°C, Package Quantity=10000, Tolerance=25%, Case/Package=0402, Core Material=Ferrite, DC Current=300mA, Depth=0.55mm, Height=0.5mm, Impedance=600R, Lead Free="Lead Free", Length=1mm, Material=Steel, Max Current Rating=300mA, Max DC Current=300mA, Military Standard=Not, Number of Circuits=1, Number of Lines=1, Number of Pins=2, Packaging="Tape and Reel", Radiation Hardening=No, REACH SVHC="No SVHC", RoHS Compliant=Yes, Series=BLM15AG_SN, Shielding=Unshielded, Termination=SMD/SMT, Test Frequency=100MHz, Width=0.5mm
MD1: library part CMP-12074-000002-1, "RF FILTER LOW PASS 2.45GHZ 6SMD"
O1: library part CMP-200220-000017-1, "CRYSTAL 32.0000MHZ 8PF SMD", Case/Package=SMD/SMT, ESR (Equivalent Series Resistance)=60R, Frequency=32MHz, Load Capacitance=8pF, Max Operating Temperature=125°C, Min Operating Temperature=-40°C, Ratings=AEC-Q200, Mount="Surface Mount", Packaging="Tape and Reel"
O2: library part CMP-200220-000019-1, "CRYSTAL 32.7680KHZ 12.5PF SMD", Case/Package=SMD/SMT, ESR (Equivalent Series Resistance)=80kR, Frequency=32.768kHz, Frequency Tolerance=20ppm, Load Capacitance=12.5pF, Max Operating Temperature=85°C, Min Operating Temperature=-40°C, Height=0.024inch, Length=0.081inch, Mount="Surface Mount", Packaging="Cut Tape", RoHS Compliant=Yes, Series=NX2012SA, Width=0.047inch
Q1: library part CMP-2000-06172-1, "N-Channel Enhancement Mode MOSFET, 20 V, -55 to 150 degC, 3-Pin SOT23, RoHS, Tape and Reel", Drain-Source On Resistance-Max=29mO, Drain-to-Source Voltage [Vdss]=20V, Manufacturer="Diodes Inc", Package Description="3-Pin Small Outline Transistor, Body 2.9 x 1.3 mm, Pitch 0.96 mm", Package Reference=SOT23-3, Rated Power Dissipation=740mW, Channel Type=N-Channel, Datasheet URL=http://www.diodes.com/_files/datasheets/ds31867.pdf, Datasheet Version="Rev. 5-2, 09/2013", Manufacturer URL=http://www.diodes.com/, Mounting Technology=SurfaceMount, Qg Gate Charge=5.4nC
R1 R2 R3 R4 R5 R6 R8 R9 R10 R11 R12 R14 R15 R16 R17 R19: library part CMP-13261-000953-1, "Res Thick Film 0402 1.87kΩ 1% 0.063W ±100ppm/°C Molded SMD T/R", Case Code (Imperial)=0402, Case Code (Metric)=1005, Max Operating Temperature=155°C, Max Power Dissipation=63mW, Min Operating Temperature=-55°C, Package Quantity=1, Resistance=1.87kR, Temperature Coefficient=100ppm/°C, Tolerance=1%, Voltage Rating (DC)=50V, Case/Package=0402, Composition="Thick Film", Contact Plating=Tin, Depth=0.5mm, Features="Moisture Resistant", Height=0.016inch, Lead Free="Lead Free", Length=1mm, Military Standard=Not, Number of Terminations=2, Packaging="Tape and Reel", Power Rating=63mW, Radiation Hardening=No, Width=0.02inch
SW1: library part CMP-10038-000025-1, "SWITCH SLIDE SPDT 1MA 5V", Actuator Color=Black, Case/Package=SMD/SMT, Contact Current Rating=1mA, Contact Resistance=70mR, Flammability Rating="UL94 V-2", Max Operating Temperature=85°C, Max Voltage Rating (DC)=5V, Min Operating Temperature=-20°C, Package Quantity=1, Actuator Length=1.5mm, Actuator Material=Nylon, Actuator Type=Standard, Contact Material="Copper Alloy", Contact Plating=Silver, Current Rating=1mA, Depth=4.82mm, Electrical Life=15000Cycles, Housing Material=Nylon, Length=7.8mm, Max Current Rating=1mA, Mount="Surface Mount", Orientation="Right Angle", Packaging="Tape and Reel", Radiation Hardening=No, REACH SVHC="No SVHC", RoHS Compliant=Yes, Series=JS, Switch Function=On-On, Switch Travel=1.5mm, Termination="Gull Wing", Throw Configuration=SPDT, Voltage Rating (DC)=5V
U1: library part CMP-0244-00328-2, "IC REG LINEAR 3.3V 150MA SOT23-5", Case/Package=SOT-23, Dropout Voltage=60mV, Input Bias Current=85uA, Max Input Voltage=6V, Max Operating Temperature=125°C, Max Output Current=150mA, Min Current Limit=300mA, Min Input Voltage=2.5V, Min Operating Temperature=-40°C, Min Output Voltage=3.3V, Output Voltage Accuracy=2%, Package Quantity=1, Quiescent Current=150uA, Accuracy=2%, Height=1.3mm, Lead Free="Lead Free", Length=3mm, Mount="Surface Mount", Number of Outputs=1, Number of Pins=5, Number of Regulators=1, Output Current=150mA, Output Type=Fixed, Output Voltage=3.3V, Packaging="Tape and Reel", Polarity=Positive, Radiation Hardening=No, Width=1.75mm
U3: library part CMP-12147-000005-1, "IC BATT CHRGR ION/POLY 16-VFQFPN", Manufacturer=STMicroelectronics, Max Junction Temp=+125°C, Max Power Dissipation=0.67W, Max Supply Voltage=12V, Min Supply Voltage=2.5V, Nominal Supply Current=1.8mA, Output Current=975mA, Output Voltage=4.2V, Package=VFQFPN16-7185330, Temperature="-40°C to +125°C", Temperature Range Low=-40°C, Automotive=No, Category=IC, ComponentLink2Description=Datasheet, ComponentLink2URL=https://www.st.com/resource/en/datasheet/l6924d.pdf, Device Class L1="Integrated Circuits (ICs)", Device Class L2="Power Management ICs", Device Class L3="Battery Management", Digikey Description="IC BATT CHRGR ION/POLY 16-VFQFPN", Footprint Url=https://www.st.com/resource/en/datasheet/l6738.pdf, Height=1mm, Ipc Land Pattern Name=QFN50P300X300X90-16, Lead Free=Yes, Manufacturer Part Number=L6924D013TR, Mouser Description="Battery Management Battery Charger Sys Li-Ion/Li-Poly", Number Of Cells=1, Number of Outputs=1, Octopart=https://octopart.com/l6924d013tr-stmicroelectronics-421996, RoHS=TRUE, Standoff Height=0.02mm, Temperature Range High=+125°C
U4: library part CMP-12182-000004-1, "MEMS NANO PRESSURE SENSOR: 260-1", Manufacturer=STMicroelectronics, Max Supply Voltage=3.6V, Min Supply Voltage=1.7V, Operating Supply Current=3-12uA, Package=HLGA-10L-8479831, Temperature="-40°C to +85°C", Temperature Range High=+85°C, Temperature Range Low=-40°C, Automotive=No, Category=IC, ComponentLink2Description=Datasheet, ComponentLink2URL=https://www.st.com/resource/en/datasheet/lps22hb.pdf, Device Class L1=Sensors, Device Class L2="Pressure Sensors", Device Class L3=unset, Digikey Description="MEMS NANO PRESSURE SENSOR: 260-1", Footprint Url=https://www.st.com/content/ccc/resource/technical/document/technical_note/73/17/9c/16/dd/96/4a/01/CD00134799.pdf/files/CD00134799.pdf/jcr:content/translations/en.CD00134799.pdf, Height=0.8mm, Lead Free=Yes, Manufacturer Part Number=LPS22HBTR, Octopart=https://octopart.com/lps22hbtr-stmicroelectronics-51851131, Port Style="No Port", RoHS=TRUE, Sensor Output=I2C,SPI
U5: library part CMP-12177-000016-1, "CONSUMER MEMS", RoHS Compliant=Yes
U7: library part CMP-12105-000013-1, "ULTRA-LOW-POWER DUAL CORE ARM CO", Ambient Temperature Range High=+85°C, Ambient Temperature Range Low=-40°C, Frequency=64MHz, Manufacturer=STMicroelectronics, Max Junction Temp=+105°C, Max Supply Voltage=3.6V, Min Supply Voltage=1.71V, Package=UFQFPN48, Temperature="-40°C to +105°C", Automotive=No, Category=IC, ComponentLink2Description=Datasheet, ComponentLink2URL=https://www.st.com/resource/en/datasheet/stm32wb55cg.pdf, Core Architecture="ARM Cortex-M4", Data Bus Width=32bits, Device Class L1="Integrated Circuits (ICs)", Device Class L2="Embedded Processors and Controllers", Device Class L3=Microcontrollers, Digikey Description="ULTRA-LOW-POWER DUAL CORE ARM CO", Height=0.65mm, Interface=I2C,SPI,UART,USART,2-Wire,USB,IrDA,Other, Lead Free=Yes, Manufacturer Part Number=STM32WB55CGU6, Memory Size=1MBytes, Memory Type=FLASH, Number Of A/D Converters=1, Number Of Adc Channels=13, Number Of Cores=1, Number Of I2C Channels=2, Number Of I/Os=30, Number Of Pwm Channels=14, Number Of Spi Channels=1, Number Of Timers/Counters=6, Number Of Uart Channels=2, Number Of Usb Channels=1, Octopart=https://octopart.com/stm32wb55cgu6-stmicroelectronics-98750847, Ram Size=256KBytes, RoHS=TRUE, Standoff Height=0mm, Temperature Range High=+105°C, Temperature Range Low=-40°C

## Via types
v1: diameter 0.5, hole 0.3, Top Signal Layer to Bottom Signal Layer, 85 vias

## Nets (pads, with @x,y where several pads share a name; then routed paths per layer and width w, separated by ;. In a path a pad name is that pad's centre, name@x,y a point inside that pad or via, vN(x,y) a via of type N, cw(c..) or ccw(c..) an arc to the next point about the centre after c; other vN are vias at no path point)
+3.3: C3.2 C8.2 C9.2 C10.2 C14.1 C15.2 C16.1 C17.2 C18.1 C19.2 C20.2 C21.1 C22.2 C26.2 D5.1 IC22.H8 IC22.J6 J2.4 L3.1 R9.1 R15.2 R16.2 R19.2 SW1.3 U1.5 U2.1 U2.2 U2.8 U4.1 U4.6 U4.10 U5.1 U5.5 U5.8 U5.12 U7.1 U7.20 U7.23 U7.34 U7.35 U7.40 U7.48 V.2 | length 75.3
  Top Signal Layer w0.15: v1(21.08,5.77) R19.2 ; C17.2 23.01,3.96 23.26,4.21 L3.1 ; v1(22.997,11.635) 22.997,11.553 23.343,11.206 23.784,11.206 C26.2@23.82,11.17 ; C16.1@24.8,11.09 24.8,10.7 25.54,9.96 25.975,9.96 26.005,9.99 26.005,10.03 U7.48 ; C16.1@24.8,11.3 C16.1@24.88,11.38 ; U7.1 25.37,9.415 25.37,9.578 23.82,11.128 C26.2@23.82,11.17 ; R16.2@25.761,12.07 25.48,12.07 25.285,11.875 25.285,11.626 25.104,11.445 24.935,11.445 24.7,11.21 24.7,11.19 24.68,11.17 C26.2@23.82,11.17 ; R16.2@25.84,12.127 25.851,12.139 26.49,12.139 R15.2@26.48,12.129 ; R15.2 26.61,12.17 26.975,12.535 29.365,12.535 29.55,12.35 R9.1 ; v1(28.71,0.49) 28.71,1.264 29.121,1.675 29.305,1.675 29.55,1.92 U7.20 ; R9.1@29.56,12.209 30.121,12.209 30.34,11.99 C22.2 30.34,10.98 30.05,10.69 U7.40 ; U7.23 31.05,2.81 v1@31.44,2.42 ; v1@31.53,2.58 v1(31.53,2.51) 31.53,2.04 C18.1@31.63,1.94 ; C19.2@31.61,1.09 C18.1@31.61,1.96 ; U7.34 33.03,8.36 33.61,8.94 33.61,9.38 33.74,9.51 C21.1 34.27,9.52 C20.2 34.035,10.555 33.745,10.555 33.67,10.63 ; U7.35 32.623,8.86 33.037,8.86 33.354,9.176 33.354,9.624 33.67,9.94 33.67,10.63 ; v1(33.32,11.6) 33.35,11.57 33.77,11.57 ; SW1.3 36.57,11.331 35.713,12.188 34.739,12.188 34.535,11.984 34.535,11.815 34.3,11.58 33.78,11.58 33.67,11.47 33.67,10.63
  Bottom Signal Layer w0.15: v1@9.4,5.3 v1(9.4,5.35) 10.35,5.35 U1.5 ; C3.2 10.1,5.625 U1.5@10.325,5.4 ; v1(11.14,11.33) J2.4 ; v1(22.997,11.635) 23.073,11.635 23.355,11.353 23.461,11.353 23.644,11.17 24.87,11.17 ; v1(23.26,4.935) 23.26,3.54 23.41,3.39 23.962,3.39 23.993,3.36 24.407,3.36 24.7,3.653 24.7,3.663 25.231,4.194 25.231,4.356 25.925,5.05 U4.1 U4.1@25.95,5.05 ; v1(23.491,7.311) 23.829,7.649 24.45,7.649 25.239,8.438 U2.8 ; U2.1 U2.2 23.915,8.988 24.329,8.988 24.87,9.529 24.87,11.17 ; U4.10 26.1,4.637 26.1,4.9 U4.1@25.95,5.05 ; D5.1 26.886,11.775 25.475,11.775 24.87,11.17 ; U5.1 28.45,3.4 27.976,3.874 27.976,5.25 ; C8.2@29.67,6.9 29.69,6.9 29.736,6.854 C9.2@29.736,6.06 ; C9.2@29.739,6.057 30.407,6.057 30.613,5.851 31,5.464 31,5 31.1,4.9 U5.8 31.75,4.9 32.05,4.6 32.05,4.19 C10.2 ; v1(31.53,2.51) 30.84,2.51 30.55,2.8 U5.12 30.511,3.276 30.511,3.75 29.6,4.661 29.6,5.013 U5.5 29.55,5.175 29.45,5.275 29.364,5.275 29.289,5.35 28.486,5.35 28.386,5.25 27.976,5.25 ; V.2 v1(38.65,12.05) ; U4.1@25.95,5.05 26.475,5.05 26.975,5.55 U4.6 27.976,5.55 27.976,5.25
  other v1: 18,4.6 16.4,5.4
GND: B.2 C1.1 C2.1 C3.1 C4.1 C5.2 C6.2 C7.1 C8.1 C9.1 C10.1 C14.2 C15.1 C16.2 C17.1 C18.2 C19.1 C20.1 C21.2 C22.1 C23.2 C24.1 C25.1 C26.1 C27.2 D3.1 D44.2 IC22.C5 IC22.K3 IC22.K8 J2.1 MD1.A2 MD1.B1 MD1.B2 MD1.B3 O1.2 O1.4 Q1.2 R1.2 R2.2 R4.2 R10.1 R11.2 R17.2 SW1.4 SW1.5 U1.2 U2.3 U2.4 U3.6 U3.7 U3.9 U4.3 U4.5 U4.8 U4.9 U5.6 U5.7 U7.22 U7.32 U7.49 USB.A1-B12 USB.B1-A12 USB.GND | length 110.3
  Top Signal Layer w0.15: USB.GND@6.1,0.855 6.507,0.855 7.25,1.598 USB.B1-A12 ; USB.GND@6.1,12.094 6.507,12.094 7.25,11.351 USB.A1-B12 ; USB.GND@6.713,0.855 7.119,0.449 C5.2 ; C6.2 11.995,4.78 12.297,5.082 12.297,5.172 12.642,5.516 12.789,5.516 12.95,5.677 R1.2 R2.2 ; v1(11.53,0.43) R4.2 12.221,0.832 12.309,0.92 12.514,0.92 12.675,1.081 12.675,1.37 U3.6 U3.7 ; D44.2 v1(12.975,7.4) 13.55,7.4 13.75,7.2 R2.2 ; v1(14.59,1.4) 14.575,1.4 14.325,1.65 U3.9 15.21,2.02 C4.1 16.517,1.88 16.95,1.447 B.2 ; C7.1 15.35,5.34 15.115,5.575 14.815,5.575 14.691,5.699 R2.2 ; v1(20.4,3.815) 20.495,3.815 20.64,3.96 C17.1 21.57,3.97 C25.1 ; R17.2 21.211,8.849 C24.1 21.12,8.94 C23.2 21.14,9.97 21.375,10.205 21.375,10.73 v1(22.28,11.635) ; v1@22.28,11.62 v1(22.28,11.635) ; C16.2@24.7,12.07 24.68,12.05 23.84,12.05 23.307,12.05 23.098,12.259 22.904,12.259 v1(22.28,11.635) ; C14.2 29.99,1.05 30.097,0.943 MD1.B1 ; v1(30.4,0.47) MD1.B1 ; MD1.B3 MD1.B2 ; U7.22 30.55,4.86 U7.49 29.55,7.36 U7.32 v1(32.9,7.36) ; MD1.A2 MD1.B2 ; C22.1 31.221,11.491 R10.1@31.221,12.22 ; R10.1 31.243,12.3 31.404,12.461 31.404,12.608 31.607,12.811 32.489,12.811 32.94,12.36 v1(33.64,12.36) 33.707,12.427 34.104,12.427 34.19,12.513 36.207,12.513 SW1.5 37.33,9.11 37.33,7.87 36.891,7.431 35.76,7.431 ; v1(32.49,2.67) 32.49,1.09 33.36,1.09 33.39,1.06 O1.4@33.485,1.155 ; v1(33.596,5.63) 33.663,5.563 33.987,5.563 34.005,5.545 34.065,5.545 34.415,5.195 34.415,4.934 34.598,4.751 34.598,4.337 34.55,4.289 34.55,3.938 34.638,3.85 35.197,3.85 36.297,2.75 SW1.4 ; v1(33.65,3.41) 33.717,3.343 33.866,3.343 34.135,3.074 34.135,2.985 34.513,2.607 O1.2@34.513,2.527 ; C27.2 35.365,7.155 35.484,7.155 35.76,7.431 ; C20.1@35.16,10.25 C21.2 35.67,9.51 35.76,9.42 35.76,7.431 ; C20.1@35.16,10.31 C15.1 ; MD1.B1 MD1.B2
  Bottom Signal Layer w0.15: C3.1 C1.1 11.01,7.4 v1(12.975,7.4) ; v1(11.53,0.43) 11.53,1.29 C2.1 11.61,1.35 12,1.35 12.3,1.65 12.3,2.611 11.825,3.086 11.825,3.914 11.986,4.075 12.025,4.075 12.4,4.45 U1.2 ; J2.1 v1(18.22,12.31) ; IC22.K3 v1(20.4,3.815) ; v1(22.28,11.635) 22.949,10.967 22.949,10.45 23.079,10.45 23.59,9.939 U2.4 U2.3 ; v1(23.05,6.8) 23.05,6.705 23.204,6.551 23.204,6.413 23.323,6.295 24.197,6.295 24.198,6.294 24.882,6.294 24.883,6.295 25.64,6.295 25.872,6.062 U4.3 ; v1(24.839,3.085) 24.854,3.1 25.514,3.1 26.65,4.236 26.65,4.488 U4.9 U4.8 ; C9.1 C9.1@28.61,6.062 ; U5.7 U5.6 30,5.112 30,5.464 29.807,5.657 29.442,5.657 29.384,5.715 28.735,5.715 28.61,5.84 C9.1@28.61,6.062 ; C10.1 32.1,3.24 32.423,2.917 32.423,2.737 v1(32.49,2.67) ; v1(32.9,7.36) 32.995,7.36 33.138,7.217 33.191,7.217 33.279,7.129 R11.2 ; v1(33.65,3.41) 33.609,3.451 33.609,3.741 33.3,4.05 33.143,4.05 32.85,4.343 32.85,4.5 30.295,7.055 30.295,7.605 29.6,8.3 28.95,8.3 28.81,8.16 28.81,6.9 28.025,6.9 27.2,6.075 U4.5 C9.1@28.61,6.062
  other v1: 16.4,3.8 18.8,9.4
Net10uh_1: 10uh.1 L2.1
Net10uh_2: 10uh.2 C27.1 U7.31 | length 3
  Top Signal Layer w0.15: U7.31 34.19,6.86 34.24,6.91 10uh.2
NetANT2_1: ANT2.1 MD1.A1 | length 5.9
  Top Signal Layer w0.15: MD1.A1 30.93,0.913 30.92,0.903 30.92,0.63 31.12,0.43 35.614,0.43 36.039,0.855 ANT2.1
NetC2_2: C2.2 U1.4 | length 2.3
  Bottom Signal Layer w0.15: U1.4 11.25,3.5 11.5,3.25 11.5,2.951 11.6,2.851 C2.2
NetC5_1: C5.1 U3.5 | length 2.7
  Top Signal Layer w0.15: C5.1 10.385,0.684 10.909,0.684 11.671,1.445 U3.5 12.25,1.345 U3.5@12.175,1.27
NetC7_2: C7.2 R3.1 U3.12 | length 8
  Top Signal Layer w0.15: U3.12 14.425,3.52 15.09,4.185 15.115,4.185 C7.2@15.274,4.344 ; R3.1 15.22,0.43 15.87,1.08 v1(15.87,1.14) ; v1(14.45,4.223) 14.545,4.223 14.666,4.344 C7.2@15.274,4.344 ; C7.2 15.35,4.42 C7.2@15.274,4.344
  Mid Signal Layer w0.15: v1(14.45,4.223) 14.45,3.157 15.09,2.517 15.09,1.48 15.211,1.359 15.556,1.359 15.775,1.14 v1(15.87,1.14)
NetC23_1: C23.1 O2.1 U7.2 | length 4.1
  Top Signal Layer w0.15: C23.1 22.04,9.93 23.35,9.93 23.51,9.77 24.352,9.77 24.44,9.682 24.44,9.32 24.9,8.86 U7.2
NetC24_2: C24.2 O2.2 U7.3 | length 4
  Top Signal Layer w0.15: C24.2 22.07,8.87 22.785,8.87 23.385,8.27 23.51,8.27 23.51,8.3 23.89,8.68 24.62,8.68 24.865,8.435 25.137,8.435 25.35,8.435 U7.3
NetC25_2: C25.2 D4.2 R19.1 U7.7 | length 5.2
  Top Signal Layer w0.15: D4.2 22.22,6.69 22.55,6.36 ; C25.2 22.45,5.741 R19.1 22.479,6.289 22.55,6.36 ; U7.7 25.359,6.294 24.375,6.294 24.374,6.295 22.946,6.295 22.938,6.287 22.648,6.287 22.575,6.36 22.55,6.36
NetD1_1: D1.1 U3.3 U7.17 | length 21.5
  Top Signal Layer w0.15: D1.1 10.18,2.25 v1(10.7,2.25) 10.795,2.25 11.065,2.52 U3.3 ; v1(22.39,1.19) 22.89,1.69 27.757,1.69 28.05,1.983 28.05,2.397 U7.17
  Mid Signal Layer w0.15: v1(10.7,2.25) 12.411,2.25 14.021,0.64 21.84,0.64 v1(22.39,1.19)
NetD1_2: D1.2 R6.2 | length 0.9
  Top Signal Layer w0.15: D1.2 9.321,2.351 R6.2
NetD2_1: D2.1 U3.4 U7.18 | length 22.1
  Top Signal Layer w0.15: D2.1 10.17,1.35 v1(10.7,1.35) 10.7,1.432 10.995,1.727 10.995,1.815 11.2,2.02 U3.4 ; v1(23.22,1.19) 23.315,1.19 23.48,1.355 27.882,1.355 28.55,2.023 U7.18
  Mid Signal Layer w0.15: v1(10.7,1.35) 12.851,1.35 13.886,0.315 22.345,0.315 v1(23.22,1.19)
NetD2_2: D2.2 R5.2 | length 3.3
  Top Signal Layer w0.15: D2.2@9.01,1.37 8.49,1.89 8.49,3.41 9,3.92 9.321,3.92 R5.2
NetD3_2: D3.2 R14.2 | length 0.8
  Top Signal Layer w0.15: R14.2 35.14,6.059 D3.2
NetD4_1: D4.1 J2.5 | length 17.4
  Top Signal Layer w0.15: v1(14.52,6.4) 14.52,6.758 15.136,7.374 v1(21.045,7.374) ; D4.1 20.695,7.034 v1@21.035,7.374
  Bottom Signal Layer w0.15: J2.5 9.145,12.305 9.145,11.485 10.21,10.42 12.41,10.42 14.52,8.31 v1(14.52,6.4)
NetD5_2: D5.2 Q1.3 V.1 | length 16.4
  Bottom Signal Layer w0.15: D5.2@30.456,11.775 30.55,11.68 Q1.3 30.7,10.2 30.7,7.55 30.77,7.48 30.77,7.04 32.679,5.13 33.804,5.13 34.096,5.423 34.096,6.963 34,7.06 34,10.516 V.1
NetD44_1: D44.1 U7.37 | length 26.8
  Top Signal Layer w0.15: D44.1 11.744,6.406 v1(12.95,6.406) ; U7.37 31.6,10.035 v1(32.825,10.035) v1@32.83,10.03
  Mid Signal Layer w0.15: v1(12.95,6.406) 13.635,7.091 13.648,7.091 13.736,7.179 13.736,8.916 15.605,10.785 18.665,10.785 18.795,10.916 21.016,10.916 21.121,10.81 23.88,10.81 25.231,12.161 28.031,12.161 28.657,11.535 31.324,11.535 v1(32.825,10.035)
NetD44_3: D44.3 U7.38 | length 26.3
  Top Signal Layer w0.15: D44.3 v1(13,8.35) ; U7.38 31.05,10.46 31.17,10.58 31.799,10.58 31.869,10.65 32.294,10.65 32.367,10.723 v1(32.844,10.723)
  Mid Signal Layer w0.15: v1(13,8.35) 13.411,8.761 13.411,9.051 15.47,11.11 18.53,11.11 18.661,11.241 21.15,11.241 21.256,11.135 23.745,11.135 25.1,12.49 28.613,12.49 28.658,12.535 29.072,12.535 29.118,12.49 30.84,12.49 32.553,10.777 32.79,10.777 v1(32.844,10.723)
NetD44_4: D44.4 USB.A6 | length 3.3
  Top Signal Layer w0.15: USB.A6@7.323,6.796 USB.A6 7.273,6.7 8.05,6.7 8.2,6.85 8.2,7.489 8.686,7.975 8.725,7.975 9.1,8.35 D44.4
NetD44_6: D44.6 USB.A7 | length 2.2
  Top Signal Layer w0.15: USB.A7 8.148,6.223 8.375,6.45 D44.6
NetIC22_C3: IC22.C3 U7.29 | length 21.9
  Top Signal Layer w0.15: U7.29 32.675,5.86 33.096,5.439 33.096,5.423 33.47,5.05 33.557,5.05 34.063,4.544 v1(34.098,4.544)
  Mid Signal Layer w0.15: v1(20.376,9.391) 26.7,9.391 29.961,6.13 34.215,6.13 35.598,4.747 35.598,4.268 35.37,4.04 34.602,4.04 v1(34.098,4.544)
  Bottom Signal Layer w0.15: v1(20.376,9.391) 20.391,9.391 IC22.C3
NetIC22_C4: IC22.C4 U7.45 | length 9.9
  Top Signal Layer w0.15: U7.45 v1(27.549,11.011)
  Mid Signal Layer w0.15: v1(19.6,9.4) 20.141,9.941 20.612,9.941 20.717,9.835 24.295,9.835 25.631,11.171 26.594,11.171 26.722,11.043 27.518,11.043 v1(27.549,11.011)
NetIC22_C6: IC22.C6 U7.44 | length 12.7
  Top Signal Layer w0.15: U7.44 v1(28.05,10.545)
  Mid Signal Layer w0.15: v1(18,9.4) 18,9.93 18.17,10.1 19.372,10.1 19.537,10.266 20.746,10.266 20.852,10.16 24.16,10.16 25.511,11.511 27.762,11.511 28.053,11.22 28.053,10.549 v1(28.05,10.545)
NetIC22_C7: IC22.C7 U7.43 | length 14.3
  Top Signal Layer w0.15: U7.43 28.55,10.997 v1(28.553,11.001)
  Mid Signal Layer w0.15: v1(17.2,9.4) 17.19,9.41 17.19,9.97 17.68,10.46 19.211,10.46 19.342,10.591 20.881,10.591 20.986,10.485 24.015,10.485 25.365,11.836 27.896,11.836 28.378,11.354 28.378,11.27 28.553,11.095 v1(28.553,11.001)
NetIC22_C8: IC22.C8 U7.19 | length 24.6
  Top Signal Layer w0.15: v1(20.47,1.19) 21.05,0.61 23.42,0.61 23.84,1.03 28.016,1.03 28.875,1.889 28.875,2.294 29.05,2.469 U7.19
  Mid Signal Layer w0.15: v1(16.4,9.4) 14.02,7.02 14.02,5.95 14.18,5.79 14.597,5.79 15.2,5.187 15.2,3.374 17.513,1.06 20.093,1.06 20.156,1.123 20.403,1.123 v1(20.47,1.19)
NetIC22_D4: IC22.D4 U7.5 | length 7.9
  Top Signal Layer w0.15: v1(24.575,7.165) 24.619,7.165 24.815,7.36 U7.5@25.419,7.36
  Mid Signal Layer w0.15: v1(19.6,8.6) 19.6,8.112 21.117,6.595 21.422,6.595 21.787,6.23 24.26,6.23 24.48,6.45 24.48,6.557 24.575,6.653 v1(24.575,7.165)
NetIC22_D5: IC22.D5 U7.28 | length 17.9
  Top Signal Layer w0.15: U7.28 32.7,5.36 32.996,5.064 32.996,4.974 33.35,4.62 v1(33.35,4.55)
  Mid Signal Layer w0.15: v1(18.8,8.6) 19.275,8.125 19.275,7.977 20.982,6.27 21.287,6.27 21.652,5.905 26.624,5.905 27.979,4.55 v1(33.35,4.55)
NetIC22_H4: IC22.H4 U7.9 | length 6
  Top Signal Layer w0.15: v1(24.686,5.36) U7.9
  Mid Signal Layer w0.15: v1(19.6,5.4) 20.426,5.4 20.556,5.27 22.49,5.27 22.59,5.37 22.988,5.37 23.053,5.435 23.467,5.435 23.532,5.37 24.676,5.37 v1(24.686,5.36)
NetIC22_J4: IC22.J4 U7.10 | length 6.1
  Top Signal Layer w0.15: v1(24.136,4.86) U7.10
  Mid Signal Layer w0.15: v1(19.6,4.6) 21.466,4.6 21.631,4.435 23.467,4.435 23.717,4.685 23.867,4.685 24.042,4.86 v1(24.136,4.86)
NetIC22_J7: IC22.J7 U7.14 | length 18.5
  Top Signal Layer w0.15: v1(21.62,1.21) 21.62,1.28 22.51,2.17 26.241,2.17 26.546,2.475 26.546,2.731 26.55,2.735 U7.14
  Mid Signal Layer w0.15: v1(17.2,4.6) 17.2,5.69 16.99,5.9 15.88,5.9 15.575,5.595 15.575,3.458 17.648,1.385 19.958,1.385 20.263,1.69 20.677,1.69 21.145,1.222 21.608,1.222 v1(21.62,1.21)
NetIC22_J8: IC22.J8 U7.16 | length 15.1
  Top Signal Layer w0.15: v1(27.55,2.19) U7.16
  Mid Signal Layer w0.15: v1(16.4,4.6) 15.9,4.1 15.9,3.593 17.783,1.71 19.824,1.71 20.128,2.015 20.812,2.015 21.116,1.71 27.07,1.71 v1(27.55,2.19)
NetIC22_K4: IC22.K4 U7.11 | length 6.5
  Top Signal Layer w0.15: v1(24.69,4.36) U7.11
  Mid Signal Layer w0.15: v1(19.6,3.8) 20.085,3.315 21.35,3.315 21.365,3.3 22.792,3.3 23.852,4.36 v1(24.69,4.36)
NetIC22_K5: IC22.K5 U7.12 | length 7.3
  Top Signal Layer w0.15: v1(24.2,3.86) U7.12
  Mid Signal Layer w0.15: v1(18.8,3.8) 19.24,3.36 19.257,3.36 19.642,2.975 19.709,2.975 19.724,2.99 21.216,2.99 21.231,2.975 23.315,2.975 v1(24.2,3.86)
NetIC22_K6: IC22.K6 U7.13 | length 10.1
  Top Signal Layer w0.15: U7.13 26.05,2.686 v1(26.046,2.682) v1@26.078,2.65
  Mid Signal Layer w0.15: v1(18,3.8) 18,3.043 18.683,2.36 19.554,2.36 19.859,2.665 21.081,2.665 21.386,2.36 25.696,2.36 26.018,2.682 v1(26.046,2.682)
NetIC22_K7: IC22.K7 U7.15 | length 12
  Top Signal Layer w0.15: U7.15 v1(27.05,2.677) v1@27.097,2.63
  Mid Signal Layer w0.15: v1(17.2,3.8) 17.675,3.325 17.675,2.908 18.548,2.035 19.689,2.035 19.994,2.34 20.946,2.34 21.251,2.035 26.408,2.035 v1(27.05,2.677)
NetJ2_2: J2.2 R10.2 U7.39 | length 23.1
  Top Signal Layer w0.15: U7.39 30.55,10.42 31.035,10.905 31.664,10.905 31.979,11.22 R10.2@31.979,12.22 ; R10.2 32,12.3 32.52,11.78 v1(32.52,11.759)
  Mid Signal Layer w0.15: v1(19.78,12.33) 23.68,12.33 24.21,12.86 31.418,12.86 v1(32.52,11.759)
  Bottom Signal Layer w0.15: J2.2 15.19,12.31 16.43,11.07 18.52,11.07 v1(19.78,12.33)
NetJ2_3: J2.3 R9.2 U7.41 | length 22.2
  Top Signal Layer w0.15: v1(28.865,12.035) 28.931,11.97 28.931,11.729 29.089,11.571 R9.2 ; U7.41 29.55,11.441 R9.2@29.56,11.451
  Bottom Signal Layer w0.15: J2.3 13.14,10.59 14.41,9.32 15.44,9.32 16.69,10.57 19.73,10.57 21.965,12.805 28.094,12.805 v1(28.865,12.035) v1(28.865,12.035)
NetL2_2: L2.2 U7.33 | length 2.6
  Top Signal Layer w0.15: U7.33 32.185,7.87 33.35,7.87 33.58,8.1 33.58,8.34 33.91,8.67 L2.2@34.275,8.67
NetL3_2: L3.2 U7.8 | length 1.4
  Top Signal Layer w0.15: L3.2 24.15,5.86 U7.8
NetMD1_A3: MD1.A3 U7.21 | length 1.7
  Top Signal Layer w0.15: U7.21 30.05,2.81 30.3,2.56 30.74,2.56 30.92,2.38 30.92,2.137 MD1.A3
NetO1_1: O1.1 U7.25 | length 5.8
  Top Signal Layer w0.15: U7.25 33.156,3.86 33.206,3.91 33.942,3.91 34.327,3.525 35.062,3.525 35.26,3.327 35.26,1.96 34.535,1.235 O1.1
NetO1_3: O1.3 U7.24 | length 2.3
  Top Signal Layer w0.15: U7.24 32.835,3.235 33.485,2.585 O1.3@33.485,2.505
NetQ1_1: Q1.1 R11.1 R12.1 | length 3.5
  Bottom Signal Layer w0.15: R11.1 32.05,6.55 31.5,7.1 Q1.1 R12.1
NetR1_1: R1.1 U3.15 | length 0.9
  Top Signal Layer w0.15: U3.15 12.789,4.134 12.789,4.78 R1.1
NetR2_1: R2.1 U3.13 U7.42 | length 27.6
  Top Signal Layer w0.15: U3.13 R2.1 13.75,4.963 13.911,5.124 14.524,5.124 v1(14.54,5.14) ; U7.42 v1(29.05,10.543)
  Mid Signal Layer w0.15: v1(14.54,5.14) 13.06,5.14 11.64,6.56 11.64,7.739 15.336,11.435 18.395,11.435 18.64,11.68 v1@21.538,11.68 ; v1(29.05,10.543) v1@29.085,10.578
  Bottom Signal Layer w0.15: v1(21.55,11.68) 21.608,11.68 22.408,12.48 27.713,12.48 28.658,11.535 28.725,11.535 29.053,11.208 29.053,10.546 v1(29.05,10.543)
NetR3_2: R3.2 R4.1 U3.8 | length 1.7
  Top Signal Layer w0.15: R4.1 R3.2 13.75,0.509 U3.8
NetR8_1: R8.1 USB.A5 | length 3
  Top Signal Layer w0.15: USB.A5 7.325,7.8 8,7.8 8.2,8 8.2,8.779 8.839,9.417 8.839,9.439 9,9.6 R8.1
NetR12_2: R12.2 U7.36 | length 1.9
  Top Signal Layer w0.15: U7.36 v1(32.83,9.36)
  Bottom Signal Layer w0.15: v1(32.83,9.36) 33.24,8.95 33.24,8.389 R12.2
NetR14_1: R14.1 U7.30 | length 2.2
  Top Signal Layer w0.15: U7.30 33.38,6.36 33.61,6.13 R14.1
NetR15_1: R15.1 U2.6 U4.2 U5.13 U7.46 | length 43.2
  Top Signal Layer w0.15: R15.1 26.61,11.37 26.983,10.997 26.983,10.66 27.05,10.593 U7.46
  Mid Signal Layer w0.15: v1(27.05,10.543) 27.1,10.543 27.602,10.041 31.385,10.041 33.242,8.185 36.248,5.178 36.248,3.968 33.3,1.02 28.27,1.02 v1(27.75,0.5)
  Bottom Signal Layer w0.15: U4.2 25.925,5.55 25.615,5.86 22.538,5.86 22.318,6.08 22.318,7.13 23.161,7.974 24.315,7.974 25.34,8.998 25.34,10.449 ; U2.6 26.714,9.488 26.3,9.488 25.34,10.449 ; v1(27.05,10.543) 26.983,10.61 26.983,10.847 26.57,11.26 25.633,11.26 25.34,10.967 25.34,10.449 ; v1(27.75,0.5) 28.425,1.175 29.425,1.175 30.05,1.8 U5.13
NetR16_1: R16.1 U2.5 U4.4 U5.14 U7.47 | length 36.2
  Top Signal Layer w0.15: R16.1 25.84,11.37 26.099,11.111 26.099,11.02 26.387,10.731 v1(26.387,10.671) 26.387,10.576 26.478,10.485 26.478,10.063 26.475,10.06 U7.47
  Mid Signal Layer w0.15: v1(26.387,10.671) 26.387,10.576 26.55,10.413 26.55,10.336 27.169,9.716 31.251,9.716 35.923,5.044 35.923,4.103 33.22,1.4 27.7,1.4 v1(26.8,0.5)
  Bottom Signal Layer w0.15: v1@26.293,10.671 v1(26.387,10.671) 26.439,10.619 26.439,9.989 26.538,9.889 27.361,9.889 28.15,9.1 28.15,7.95 26.75,6.55 26.75,6.112 U4.4 ; v1(26.8,0.5) 27.8,1.5 28.85,1.5 29.55,2.2 U5.14
NetR17_1: R17.1 SW1.2 U7.4 | length 22.2
  Top Signal Layer w0.15: v1(21.72,7.39) 21.986,7.656 21.986,8.042 R17.1 21.99,8.06 22.235,7.815 24.079,7.815 24.124,7.86 U7.4 ; v1(35.098,4.54) 35.165,4.607 35.517,4.607 36.57,5.66 SW1.2
  Mid Signal Layer w0.15: v1(21.72,7.39) 22.32,7.99 27.642,7.99 30.502,5.13 34.508,5.13 v1(35.098,4.54)
NetU2_7: U2.7 U7.6 | length 7.2
  Top Signal Layer w0.15: v1(24.01,6.795) 24.098,6.795 24.273,6.62 24.509,6.62 24.51,6.619 24.759,6.619 24.925,6.785 25.349,6.785 U7.6@25.419,6.855
  Bottom Signal Layer w0.15: v1(24.01,6.795) 24.098,6.795 24.273,6.62 24.332,6.62 24.333,6.619 24.747,6.619 25.407,7.279 26.789,7.279 27.449,7.939 27.449,8.667 27.227,8.888 26.814,8.888 U2.7
NetU3_14: U3.14
VBAT: B.1 C1.2 C4.2 U1.1 U1.3 U3.10 U3.11 | length 22.9
  Top Signal Layer w0.15: U3.10 14.425,2.52 14.665,2.76 ; U3.11 14.425,3.02 14.665,2.78 14.665,2.76 ; B.1 18.517,1.663 18.517,2.553 ; v1(19.05,2.86) 18.983,2.793 18.983,2.658 18.622,2.658 18.517,2.553 ; 14.665,2.76 C4.2 18.31,2.76 18.517,2.553
  Bottom Signal Layer w0.15: C1.2 11.11,6.4 11,6.29 11.015,6.29 11.05,6.255 11,6.255 11,6.063 11.088,5.975 11.225,5.975 11.8,5.4 U1.1 13.5,5.4 13.9,5 13.9,3.7 ; U1.3 13.7,3.5 13.9,3.7 ; v1(19.05,2.86) 19.05,1.728 18.962,1.64 15.663,1.64 14.813,0.79 14.393,0.79 13.9,1.283 13.9,3.7
VUSB: C6.1 D44.5 R5.1 R6.1 R8.2 U3.1 U3.2 USB.A4-B9 USB.B4-A9 | length 17.8
  Top Signal Layer w0.15: USB.B4-A9 8.094,4.074 8.8,4.78 C6.1 ; USB.A4-B9 7.47,9.095 7.91,9.095 8.489,9.674 8.489,9.95 8.65,10.111 9.549,10.111 9.81,9.85 9.81,9.631 R8.2 10.3,9.6 10.55,9.35 10.55,7.7 10.25,7.4 ; D44.5 10.25,7.4 ; R6.1 10.1,3.13 10.346,3.376 10.346,3.759 10.507,3.92 ; U3.2 11.6,3.095 11.375,3.095 10.95,3.52 ; U3.1 10.95,3.52 ; 10.25,7.4 10.56,7.09 C6.1 ; C6.1 10.56,3.91 10.95,3.52
pads on no net: ANT2.2 IC22.A1 IC22.A2 IC22.A9 IC22.A10 IC22.B1 IC22.B9 IC22.B10 IC22.D3 IC22.D6 IC22.D7 IC22.D8 IC22.E3 IC22.E4 IC22.E5 IC22.E6 IC22.E7 IC22.E8 IC22.F3 IC22.F4 IC22.F5 IC22.F6 IC22.F7 IC22.F8 IC22.G3 IC22.G4 IC22.G5 IC22.G6 IC22.G7 IC22.G8 IC22.H3 IC22.H5 IC22.H6 IC22.H7 IC22.J3 IC22.J5 IC22.L1 IC22.L2 IC22.L9 IC22.L10 IC22.M1 IC22.M2 IC22.M9 IC22.M10 SW1. SW1.1 U3.16 U3.17 U4.7 U5.2 U5.3 U5.4 U5.9 U5.10 U5.11 U7.26 U7.27 USB.A8 USB.B5 USB.B6 USB.B7 USB.B8 V.3

## Polygon pours and split planes (outlines as drawn)
GND on GND_2 "GND_L05_P000" (solid, pour order 0): 6.5,10.95 0,10.95 0,13 39.9,13 39.9,3.25 34.2,3.25 34.2,0 0,0 0,2 6.5,2
GND on GND_1 "GND_L02_P001" (solid, pour order 1): 6.5,10.95 0,10.95 0,13 39.9,13 39.9,3.25 34.2,3.25 34.2,0 0,0 0,2 6.5,2
+3.3 on PWR "+3.3_L03_P002" (solid, pour order 2): 6.5,10.95 0,10.95 0,13 39.9,13 39.9,3.25 34.2,3.25 34.2,0 0,0 0,2 6.5,2

## Silkscreen, mask and mechanical layers (free items; w line width, h text height)
Top Overlay:
  the board outline again, w0.254

## Text inside footprints (layer, text, board x,y; h text height)
D5: Bottom Overlay "*" at 25.752,12.53 h1.27 r180; Bottom 3D Body "*" at 27.242,12.53 h1.27 r180
USB: Top 3D Body "*" at 6.615,12.532 h1.27 r270; Top Overlay "*" at 6.615,12.532 h1.27 r270